# Altium PCB HW_ADHERENT_SYSCTRL_R1.PcbDoc (part 2 of 3)
Units mm, origin at the board's own origin, x right, y up, seen from the top; angles counter-clockwise.
Board outline 160 x 150 mm, 4 copper layers (Top Layer, Int1 (GND), Int2 (PWR), Bottom Layer), stack 1.369 mm thick; 228 components, 143 nets, 829 pads, 0 vias.
Unrouted connection lines stored in the file: 328.
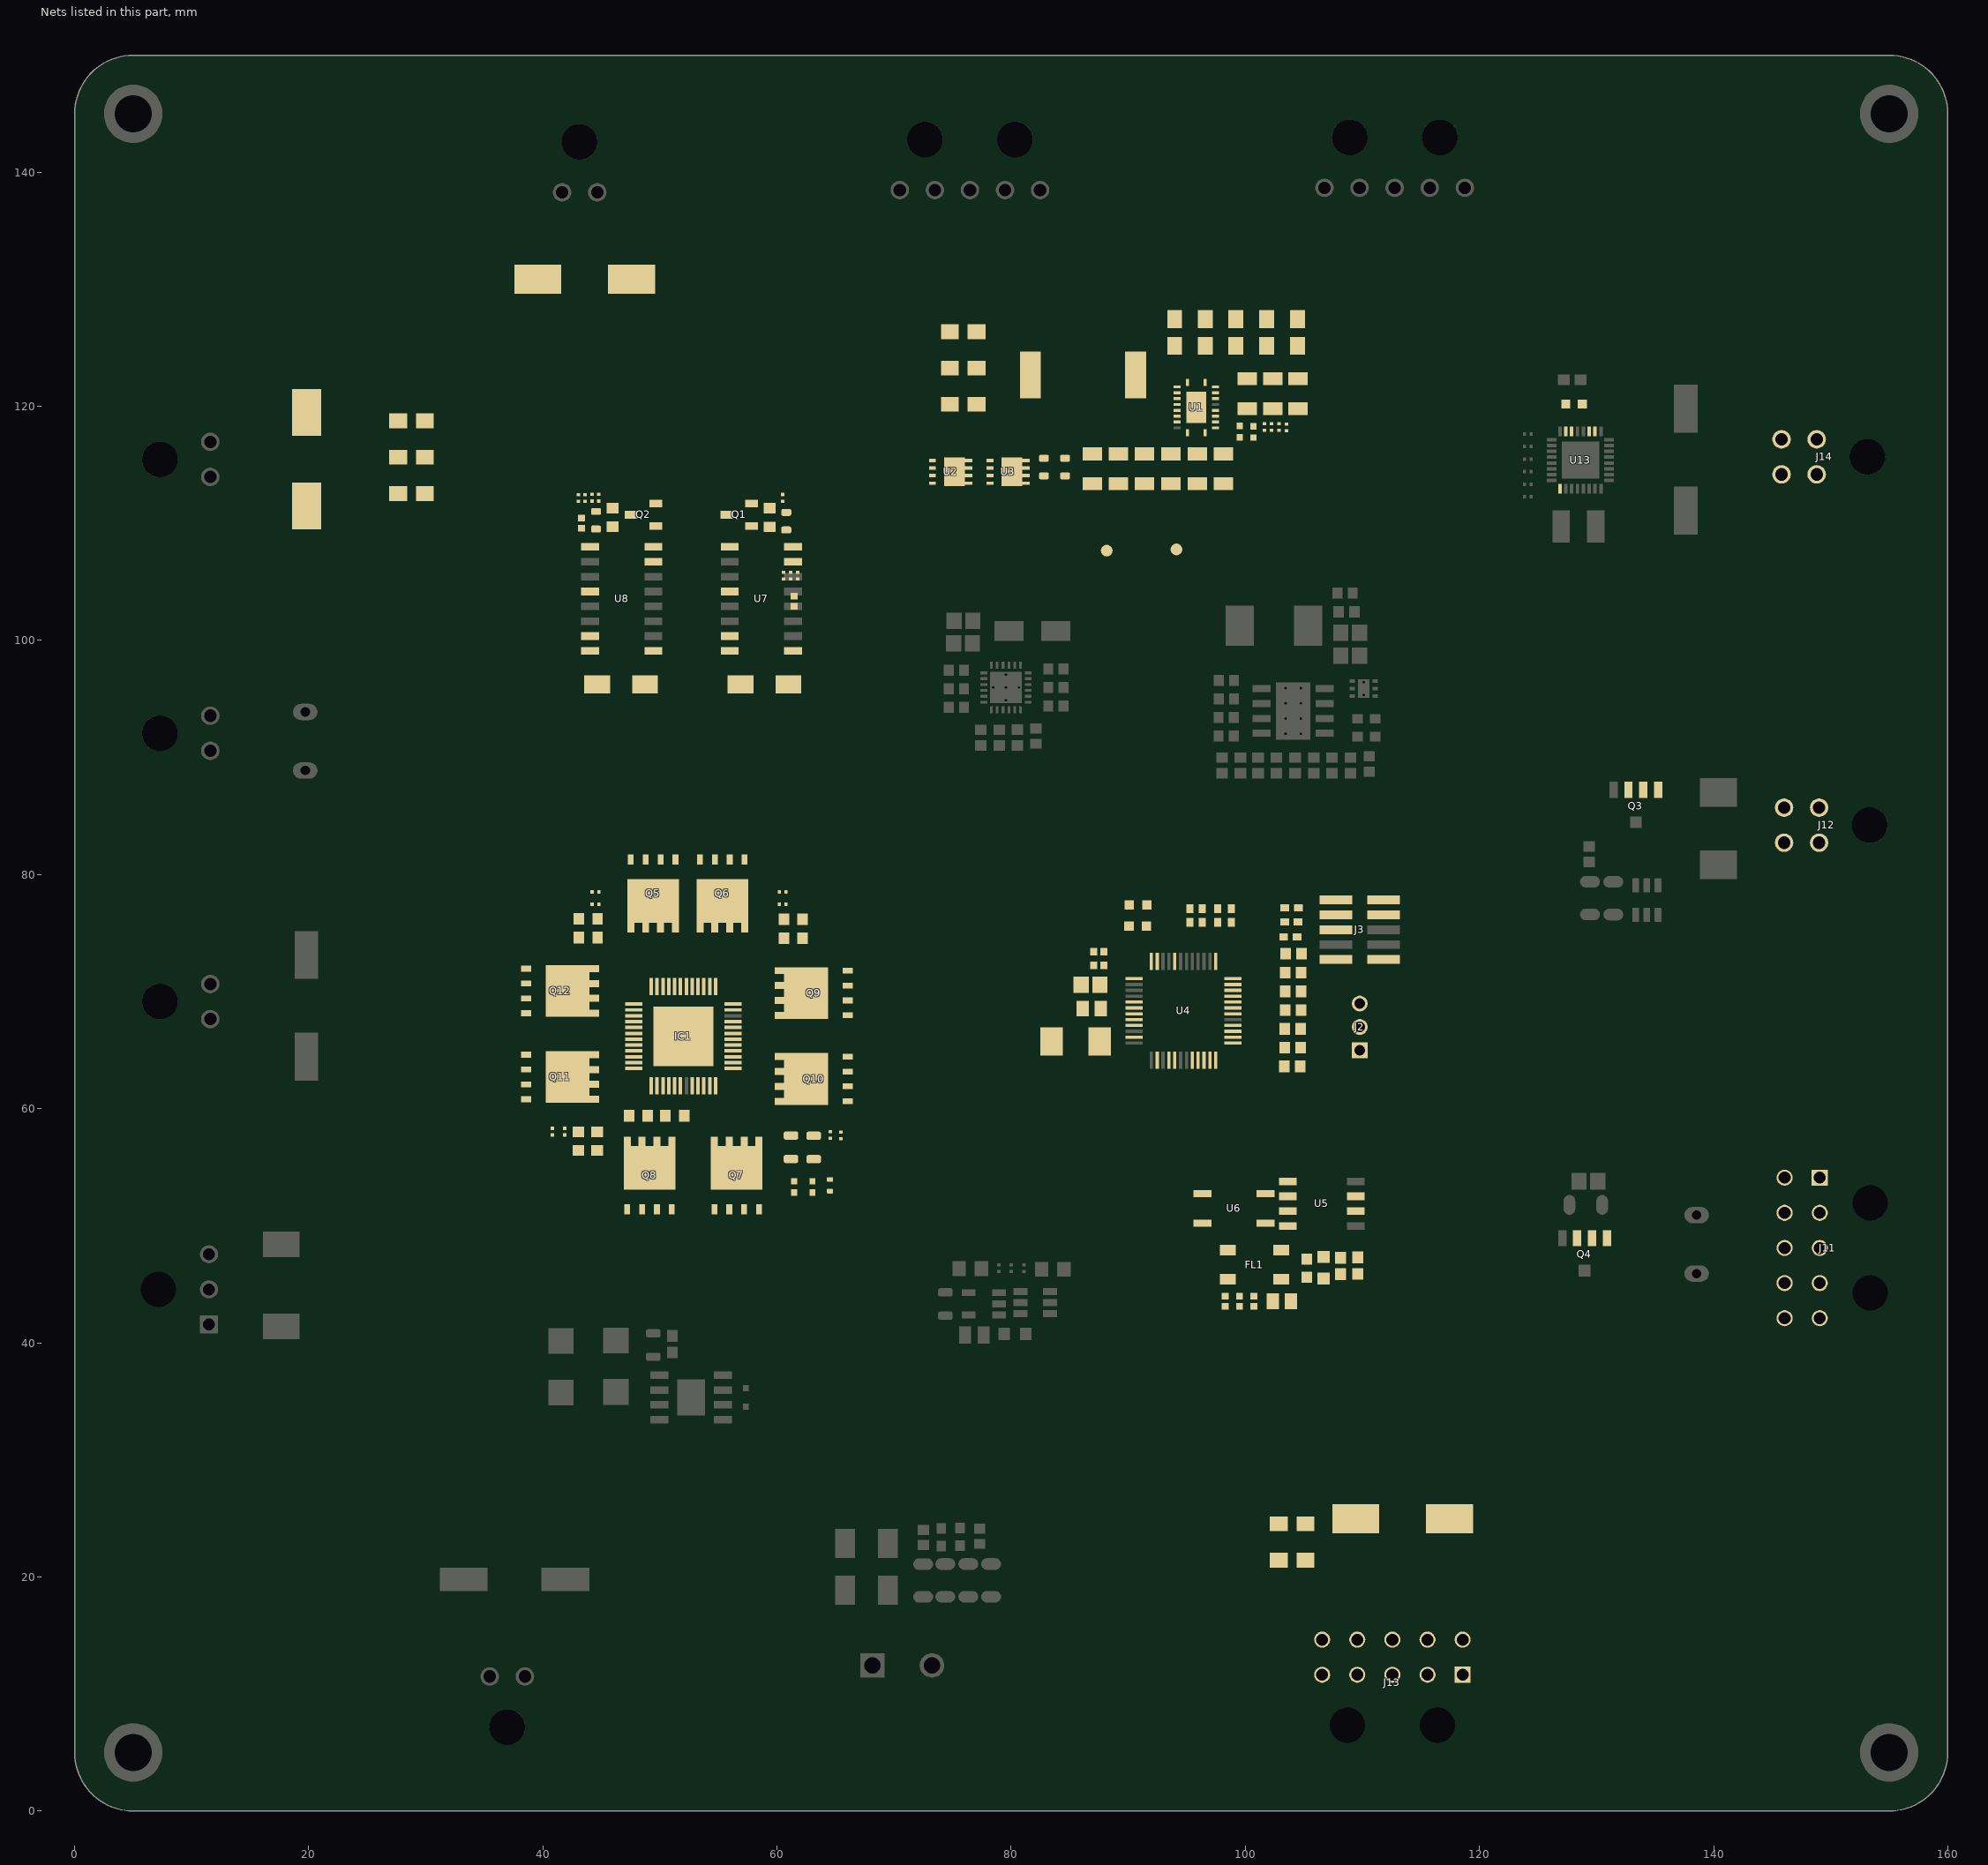
[diagram p4: the nets of this part, all layers, seen from the top]

## Part data
C1 C9 C10: library part 150uF-6.3V-20%-AL-LOESR-SMD_5x6_5, "CAP ALUM POLY 100UF 20% 50V SMD", manufacturer=Nichicon, Manufacturer Part Number=PCV1H101MCL2GS, Supplier Part Number=493-4558-1-ND
C2 C3 C4 C5: library part CAP1206_4.7uF_100V, "4.7 µF ±10% 100V Ceramic Capacitor X7S 1206 (3216 Metric)", Manufacturer Part Number=12061Z475KAT2A, Order Code="DIGI : 445-180362-1-ND"
C6 C8: library part Cap, "CAP CER 0.1UF 50V X7R 0402", manufacturer="TDK Corporation", Manufacturer Part Number=C1005X7R1H104K050BB, Supplier Part Number=445-5932-1-ND
C7 C32 C33 C34 C35 C37 C59 C61 C65 C66 C67 C68 C69: library part C0201-100n, "Capacitor, X5R, ±10%", manufacturer=N.A., Part number IPS="00000001248, 00000002505", Part number NEMS=100200078, Part number Norautron=262071862, Artikkelnr Noca=N.A., Author=rsk, Component Class=Capacitors, Component Status=Active, componentlink1description=Datasheet, componentlink1url=N.A., componentlink2description="Supplier link", componentlink2url=N.A., Footprint Doc=0201, HelpURL=N.A., LatestRevisionDate=2017-11-09, Manufacturer Part Number=N.A., Note=16V, Pad Count=2, Part Number=C0201-100n, partid=100200078, Published=2014-11-13, Supplier 1=N.A., Supplier 2=N.A., Supplier Part Number 1=N.A., Supplier Part Number 2=N.A.
C11: library part GRM21BZ71H475KE15K, "CAP CER 4.7UF 50V X7R 0805", Device Package="0805 (2012 Metric)", manufacturer="Murata Electronics", Operating Temperature="-55°C ~ 125°C", Supplier Part Number 1=490-GRM21BZ71H475KE15KCT-ND, Temperature Coefficient=X7R, Tolerance=±10%, Voltage - Rated=50V, Applications="General Purpose", Capacitance="4.7 µF", componentlink1description=Datasheet, componentlink1url=https://search.murata.co.jp/Ceramy/image/img/A01X/G101/ENG/GRM21BZ71H475KE15-01.pdf, componentlink2description="DigiKey Link", componentlink2url=https://www.digikey.com/en/products/detail/murata-electronics/GRM21BZ71H475KE15K/13904908, lastupdated="6.04.2026 19:31:51", Lifecycle Status=Active, Minimum Order=1, Mounting Type="Surface Mount, MLCC", Package / Case="0805 (2012 Metric)", packaging=TapeAndReel, Part Number=GRM21BZ71H475KE15K, Part Status=Active, partid=39591, price=0.17, series=GRM, Size / Dimension="0.079\" L x 0.049\" W (2.00mm x 1.25mm)", Supplier 1=DigiKey, Thickness (Max)="0.057\" (1.45mm)"
C12 C13 C14 C15 C16: "CAP CER 0.1UF 50V X7R 0603", Capacitance="0.1 µF", Device Package="0603 (1608 Metric)", manufacturer="Murata Electronics", Operating Temperature="-55°C ~ 125°C", Ratings=AEC-Q200, Supplier Part Number 1=490-8020-1-ND, Temperature Coefficient=X7R, Tolerance=±10%, Voltage - Rated=50V, Applications=Automotive, componentlink1description=Datasheet, componentlink1url=https://psearch.en.murata.com/capacitor/product/GCM188R71H104KA57%23.pdf, componentlink2description="DigiKey Link", componentlink2url=https://www.digikey.com/en/products/detail/murata-electronics/GCM188R71H104KA57J/2591942, lastupdated="6.04.2026 19:22:36", Lifecycle Status=Active, Minimum Order=1, Mounting Type="Surface Mount, MLCC", Package / Case="0603 (1608 Metric)", packaging=TapeAndReel, Part Number=GCM188R71H104KA57J, Part Status="Not For New Designs", partid=60442, price=0.03, series=GCM, Size / Dimension="0.063\" L x 0.031\" W (1.60mm x 0.80mm)", Supplier 1=DigiKey, Thickness (Max)="0.035\" (0.90mm)"
C17 C18: library part GMC04CG8R2J25NT, "CAP0402 COG 8.2PF 5% 25V", Device Package="0402 (1005 Metric)", manufacturer="Cal-Chip Electronics, Inc.", Operating Temperature="-55°C ~ 125°C", Supplier Part Number 1=4713-GMC04CG8R2J25NTCT-ND, Temperature Coefficient="C0G, NP0", Tolerance=±5%, Voltage - Rated=25V, Applications="General Purpose", Capacitance="8.2 pF", componentlink1description=Datasheet, componentlink1url=https://calchip.com/wp-content/uploads/2025/05/GMC-Series-3.pdf, componentlink2description="DigiKey Link", componentlink2url=https://www.digikey.com/en/products/detail/cal-chip-electronics-inc/GMC04CG8R2J25NT/27784357, Features="General Purpose", lastupdated="6.04.2026 19:06:51", Lifecycle Status=Active, Minimum Order=1, Mounting Type="Surface Mount, MLCC", Package / Case="0402 (1005 Metric)", packaging=TapeAndReel, Part Number=GMC04CG8R2J25NT, partid=61382, price=0.07, series=GMC, Size / Dimension="0.039\" L x 0.020\" W (1.00mm x 0.50mm)", Supplier 1=DigiKey, Thickness (Max)="0.022\" (0.55mm)"
C19: library part GMC10X7R105K25NT, "CAP0603 X7R 1UF 10% 25V", Device Package="0603 (1608 Metric)", manufacturer="Cal-Chip Electronics, Inc.", Operating Temperature="-55°C ~ 125°C", Supplier Part Number 1=4713-GMC10X7R105K25NTCT-ND, Temperature Coefficient=X7R, Tolerance=±10%, Voltage - Rated=25V, Applications="General Purpose", Capacitance="1 µF", componentlink1description=Datasheet, componentlink1url=https://calchip.com/wp-content/uploads/2023/05/gmc_series.pdf, componentlink2description="DigiKey Link", componentlink2url=https://www.digikey.com/en/products/detail/cal-chip-electronics-inc/GMC10X7R105K25NT/22461338, lastupdated="6.04.2026 19:18:33", Lifecycle Status=Active, Minimum Order=1, Mounting Type="Surface Mount, MLCC", Package / Case="0603 (1608 Metric)", packaging=TapeAndReel, Part Number=GMC10X7R105K25NT, partid=68086, price=0.01, series=GMC, Size / Dimension="0.063\" L x 0.031\" W (1.60mm x 0.80mm)", Supplier 1=DigiKey, Thickness (Max)="0.037\" (0.95mm)"
C20: library part C0603C103K4RECTU, "CAP CER 0603 10NF 16V X7R 10%", Device Package="0603 (1608 Metric)", manufacturer=KEMET, Operating Temperature="-55°C ~ 125°C", Supplier Part Number 1=399-C0603C103K4RECTUCT-ND, Temperature Coefficient=X7R, Tolerance=±10%, Voltage - Rated=16V, Applications="ESD Protection", Capacitance="10000 pF", componentlink1description=Datasheet, componentlink1url=https://search.kemet.com/download/datasheet/C0603C103K4REC7867, componentlink2description="DigiKey Link", componentlink2url=https://www.digikey.com/en/products/detail/kemet/C0603C103K4RECTU/8643658, lastupdated="6.04.2026 19:17:55", Lifecycle Status=Active, Minimum Order=1, Mounting Type="Surface Mount, MLCC", Package / Case="0603 (1608 Metric)", packaging=TapeAndReel, Part Number=C0603C103K4RECTU, partid=66152, price=0.01, series="ESD SMD Comm X7R", Size / Dimension="0.063\" L x 0.031\" W (1.60mm x 0.80mm)", Supplier 1=DigiKey, Thickness (Max)="0.034\" (0.87mm)"
C21 C24 C77: library part GMC10CG470F200NT, "47 pF ±1% 200V Ceramic Capacitor C0G, NP0 0603 (1608 Metric)", manufacturer="Cal-Chip Electronics, Inc.", MPN=GMC10CG470F200NT, Supplier=4713-GMC10CG470F200NTDKR-ND
C22: library part CAP1461, "CAP CER 10UF 25V X5R 0603", manufacturer="Murata Electronics North America", Manufacturer Part Number=GRM188R61E106MA73D, Supplier Part Number=490-7202-1-ND, Voltage=25V, Revision=1
C23: library part CAP0603_100nF, "CAP CER 0.1UF 50V X7R 0603", Order Code="DIGI : 399-5089-1-ND", P/N=C0603C104K5RACTU
C25 C26 C27 C28 C29: library part CAP1206_22uF_35V, "22 µF ±20% 35V Ceramic Capacitor X5R 1206 (3216 Metric)", Manufacturer Part Number=C3216X5R1V226M160AC, Order Code="DIGI : 445-180362-1-ND"
C30: library part CAP0603_8.2PF_50V, "8.2 pF ±0.25pF 50V Ceramic Capacitor C0G, NP0 0603 (1608 Metric)", LCSC Manufacturer Part Number=CC0603CRNPO9BN8R2, LCSC Part Number=C277519, Manufacturer Part Number=CC0603CRNPO9BN8R2, Order Code="DIGI : 311-3865-2-ND"
C31: library part CAP0603_2.2UF_16V, "2.2 µF ±10% 16V Ceramic Capacitor X7S 0603 (1608 Metric)", Manufacturer Part Number=GRT188C71C225KE13D, Order Code="DIGI: 490-GRT188C71C225KE13DTR-ND"
C36 C38: library part C0201-10n, "Capacitor, X7R, ±10%", manufacturer=N.A., Part number IPS=00000003480, Part number NEMS=100200067, Part number Norautron=26621779, Artikkelnr Noca=N.A., Author=rsk, Component Class=Capacitors, Component Status=Active, componentlink1description=Datasheet, componentlink1url=N.A., componentlink2description="Supplier link", componentlink2url=N.A., Footprint Doc=0201, HelpURL=N.A., LatestRevisionDate=2017-11-09, Manufacturer Part Number=N.A., Note=10V, Pad Count=2, Part Number=C0201-10n, partid=100200067, Published=2014-11-13, Supplier 1=N.A., Supplier 2=N.A., Supplier Part Number 1=N.A., Supplier Part Number 2=N.A.
C39 C40: library part ECA-1HM471, "CAP ALUM 470UF 20% 50V RADIAL", Device Package="Radial, Can", Lifetime @ Temp.="2000 Hrs @ 85°C", manufacturer="Panasonic Electronic Components", Operating Temperature="-40°C ~ 85°C", Ripple Current @ High Frequency="1.105A @ 10kHz", Ripple Current @ Low Frequency="650mA @ 120Hz", Supplier Part Number 1=P5185-ND, Tolerance=±20%, Voltage - Rated=50V, Applications="General Purpose", Capacitance=470µF, componentlink1description=Datasheet, componentlink1url=//media.digikey.com/pdf/Data%20Sheets/Panasonic%20Electronic%20Components/ECA-xxM%20Series,TypeA.pdf, componentlink2description="DigiKey Link", componentlink2url=http://digikey.com/product-detail/en/panasonic-electronic-components/ECA-1HM471/P5185-ND/245044, Height - Seated (Max)="0.866\" (22.00mm)", lastupdated="2.09.2020 01:31:40", Lead Spacing="0.197\" (5.00mm)", Lifecycle Status=Active, Minimum Order=1, Mounting Type="Through Hole", Package / Case="Radial, Can", packaging=Bulk, Part Number=ECA-1HM471, Part Status=Active, partid=13256, Polarization=Polar, price=0.64, series=M, Size / Dimension="0.394\" Dia (10.00mm)", Supplier 1=DigiKey
C41 C43 C44 C53 C56: library part 08051C105K4T2A, "CAP CER 1UF 100V X7R 0805", Device Package="0805 (2012 Metric)", manufacturer="AVX Corporation", Operating Temperature="-55°C ~ 125°C", Ratings=AEC-Q200, Supplier Part Number 1=478-12142-1-ND, Temperature Coefficient=X7R, Tolerance=±10%, Voltage - Rated=100V, Applications=Automotive, Capacitance=1µF, componentlink1description=Datasheet, componentlink1url=http://datasheets.avx.com/AutoMLCC.pdf, componentlink2description="DigiKey Link", componentlink2url=http://digikey.com/product-detail/en/avx-corporation/08051C105K4T2A/478-12142-1-ND/9374711, lastupdated="2.09.2020 01:04:22", Lifecycle Status=Active, Minimum Order=1, Mounting Type="Surface Mount, MLCC", Package / Case="0805 (2012 Metric)", packaging=TapeAndReel, Part Number=08051C105K4T2A, Part Status=Active, partid=13414, price=0.09, series=-, Size / Dimension="0.079\" L x 0.049\" W (2.01mm x 1.25mm)", Supplier 1=DigiKey
C42: library part CL10A474KA8NNNC, "CAP CER 0.47UF 25V X5R 0603", Device Package="0603 (1608 Metric)", manufacturer="Samsung Electro-Mechanics", Operating Temperature="-55°C ~ 85°C", Supplier Part Number 1=1276-1895-1-ND, Temperature Coefficient=X5R, Tolerance=±10%, Voltage - Rated=25V, Applications="General Purpose", Capacitance="0.47 µF", componentlink1description=Datasheet, componentlink1url=http://www.samsungsem.com/kr/support/product-search/mlcc/CL10A474KA8NNNC.jsp, componentlink2description="DigiKey Link", componentlink2url=https://www.digikey.com/en/products/detail/samsung-electro-mechanics/CL10A474KA8NNNC/3887553, lastupdated="6.04.2026 19:23:45", Lifecycle Status=Active, Minimum Order=1, Mounting Type="Surface Mount, MLCC", Package / Case="0603 (1608 Metric)", packaging=TapeAndReel, Part Number=CL10A474KA8NNNC, Part Status=Active, partid=4224, price=0.01, series=CL, Size / Dimension="0.063\" L x 0.031\" W (1.60mm x 0.80mm)", Supplier 1=DigiKey, Thickness (Max)="0.035\" (0.90mm)"
C45 C50 C51: library part HMK107BJ104KA-T, "CAP CER 0.1UF 100V X5R 0603", Device Package="0603 (1608 Metric)", manufacturer="Taiyo Yuden", Operating Temperature="-55°C ~ 85°C", Supplier Part Number 1=587-5862-1-ND, Temperature Coefficient=X5R, Tolerance=±10%, Voltage - Rated=100V, Applications="SMPS Filtering", Capacitance="0.1 µF", componentlink1description=Datasheet, componentlink1url="https://ds.yuden.co.jp/TYCOMPAS/ut/detail?pn=HMK107BJ104KA-T  &u=M", componentlink2description="DigiKey Link", componentlink2url=https://www.digikey.com/en/products/detail/taiyo-yuden/HMK107BJ104KA-T/4970694, Features="High Voltage", lastupdated="6.04.2026 19:23:31", Lifecycle Status=Active, Minimum Order=1, Mounting Type="Surface Mount, MLCC", Package / Case="0603 (1608 Metric)", packaging=TapeAndReel, Part Number=HMK107BJ104KA-T, Part Status=Active, partid=8162, price=0.01, series=M, Size / Dimension="0.063\" L x 0.031\" W (1.60mm x 0.80mm)", Supplier 1=DigiKey, Thickness (Max)="0.035\" (0.90mm)"
C46: library part CL10B223KO8WPNC, "CAP CER 22NF 16V X7R 0603", Device Package="0603 (1608 Metric)", manufacturer="Samsung Electro-Mechanics", Operating Temperature="-55°C ~ 125°C", Ratings=AEC-Q200, Supplier Part Number 1=1276-CL10B223KO8WPNCCT-ND, Temperature Coefficient=X7R, Tolerance=±10%, Voltage - Rated=16V, Applications=Automotive, Capacitance="0.022 µF", componentlink1description=Datasheet, componentlink1url=https://mm.digikey.com/Volume0/opasdata/d220001/medias/docus/5458/CL10B223KO8WPNC_Spec.pdf, componentlink2description="DigiKey Link", componentlink2url=https://www.digikey.com/en/products/detail/samsung-electro-mechanics/CL10B223KO8WPNC/20498563, Features="Open Mode", lastupdated="6.04.2026 19:17:38", Lifecycle Status=Active, Minimum Order=1, Mounting Type="Surface Mount, MLCC, Epoxy", Package / Case="0603 (1608 Metric)", packaging=TapeAndReel, Part Number=CL10B223KO8WPNC, partid=64880, price=0.01, series=CL, Size / Dimension="0.063\" L x 0.031\" W (1.60mm x 0.80mm)", Supplier 1=DigiKey, Thickness (Max)="0.035\" (0.88mm)"
C47: library part C0603C103M4REC7411, "CAP CER 0603 10NF 16V X7R 20%", Device Package="0603 (1608 Metric)", manufacturer=KEMET, Operating Temperature="-55°C ~ 125°C", Supplier Part Number 1=399-C0603C103M4REC7411CT-ND, Temperature Coefficient=X7R, Tolerance=±20%, Voltage - Rated=16V, Applications="ESD Protection", Capacitance="10000 pF", componentlink1description=Datasheet, componentlink1url=https://connect.kemet.com:7667/gateway/IntelliData-ComponentDocumentation/1.0/download/datasheet/C0603C103M4REC7411, componentlink2description="DigiKey Link", componentlink2url=https://www.digikey.com/en/products/detail/kemet/C0603C103M4REC7411/8645113, lastupdated="6.04.2026 19:20:47", Lifecycle Status=Active, Minimum Order=1, Mounting Type="Surface Mount, MLCC", Package / Case="0603 (1608 Metric)", packaging=TapeAndReel, Part Number=C0603C103M4REC7411, Part Status=Active, partid=52195, price=0.01, series="ESD SMD Comm X7R", Size / Dimension="0.063\" L x 0.031\" W (1.60mm x 0.80mm)", Supplier 1=DigiKey, Thickness (Max)="0.034\" (0.87mm)"
C48 C49: library part CL10A475KL8NRNC, "CAP CER 4.7UF 35V X5R 0603", Device Package="0603 (1608 Metric)", manufacturer="Samsung Electro-Mechanics", Operating Temperature="-55°C ~ 85°C", Supplier Part Number 1=1276-6794-1-ND, Temperature Coefficient=X5R, Tolerance=±10%, Voltage - Rated=35V, Applications="General Purpose", Capacitance="4.7 µF", componentlink1description=Datasheet, componentlink1url=http://www.samsungsem.com/kr/support/product-search/mlcc/CL10A475KL8NRNC.jsp, componentlink2description="DigiKey Link", componentlink2url=https://www.digikey.com/en/products/detail/samsung-electro-mechanics/CL10A475KL8NRNC/5961278, lastupdated="6.04.2026 19:23:51", Lifecycle Status=Active, Minimum Order=1, Mounting Type="Surface Mount, MLCC", Package / Case="0603 (1608 Metric)", packaging=TapeAndReel, Part Number=CL10A475KL8NRNC, Part Status=Active, partid=2652, price=0.08, series=CL, Size / Dimension="0.063\" L x 0.031\" W (1.60mm x 0.80mm)", Supplier 1=DigiKey, Thickness (Max)="0.035\" (0.90mm)"
C52 C55 C57 C58: library part CL10A226MP8NRNC, "CAP CER 22UF 10V X5R 0603", Device Package="0603 (1608 Metric)", manufacturer="Samsung Electro-Mechanics", Operating Temperature="-55°C ~ 85°C", Supplier Part Number 1=1276-CL10A226MP8NRNCCT-ND, Temperature Coefficient=X5R, Tolerance=±20%, Voltage - Rated=10V, Applications="General Purpose", Capacitance="22 µF", componentlink1description=Datasheet, componentlink1url=https://mm.digikey.com/Volume0/opasdata/d220001/medias/docus/339/CL10A226MP8NRNC_Spec.pdf, componentlink2description="DigiKey Link", componentlink2url=https://www.digikey.com/en/products/detail/samsung-electro-mechanics/CL10A226MP8NRNC/10478990, lastupdated="6.04.2026 19:18:15", Lifecycle Status=Active, Minimum Order=1, Mounting Type="Surface Mount, MLCC", Package / Case="0603 (1608 Metric)", packaging=TapeAndReel, Part Number=CL10A226MP8NRNC, partid=67717, price=0.06, series=CL, Size / Dimension="0.063\" L x 0.031\" W (1.60mm x 0.80mm)", Supplier 1=DigiKey, Thickness (Max)="0.039\" (1.00mm)"
C54: library part 0603YW106MAT2A, "CAP CER 10UF 16V X6S 0603", Device Package="0603 (1608 Metric)", manufacturer="KYOCERA AVX", Operating Temperature="-55°C ~ 105°C", Supplier Part Number 1=478-KGM15CS61C106MTCT-ND, Temperature Coefficient=X6S, Tolerance=±20%, Voltage - Rated=16V, Applications="General Purpose", Capacitance="10 µF", componentlink2description="DigiKey Link", componentlink2url=https://www.digikey.com/en/products/detail/kyocera-avx/0603YW106MAT2A/16602928, lastupdated="6.04.2026 19:22:07", Lifecycle Status=Active, Minimum Order=1, Mounting Type="Surface Mount, MLCC", Package / Case="0603 (1608 Metric)", packaging=CutTape, Part Number=0603YW106MAT2A, Part Status=Active, partid=46681, price=0.08, series="KGM - X6S", Size / Dimension="0.063\" L x 0.031\" W (1.60mm x 0.80mm)", Supplier 1=DigiKey, Thickness (Max)="0.039\" (1.00mm)"
C60 C76: library part C0201-22n-10V-X5R-GRM033R61A223KE84_1, "Capacitor, Ceramic, 22nF 10V X5R 0201,±10%", manufacturer=Murata, Manufacturer Part Number=GRM033R61A223KE84D, Part Number=C0201-22n-10V-X5R-GRM033R61A223KE84, Part number IPS=N.A., Part number NEMS=100200495, Supplier Part Number 1=81-GRM033R61A223KE4E, Artikkelnr Noca=N.A., Author=prbu, Component Class=Capacitors, Component Status=Active, componentlink1description=Datasheet, componentlink1url=https://www.murata.com/en-sg/products/productdetail?partno=GRM033R61A223KE84%23, componentlink2description="Supplier link", componentlink2url=https://www.mouser.com/ProductDetail/Murata-Electronics/GRM033R61A223KE84E?qs=BZBei1rCqCCPqziwOnRusw%3D%3D, Footprint Doc=0201, HelpURL=N.A., LatestRevisionDate=2021-12-09, Note=10V, Pad Count=2, Part number Norautron=N.A., partid=100200495, Published=2021-12-09, Supplier 1=Mouser, Supplier 2=Digi-Key, Supplier Part Number 2=490-13334-1-ND
C62 C63 C80 C82: library part CAP0805_4.7UF_50V, "4.7 µF ±10% 50V Ceramic Capacitor X5R 0805 (2012 Metric)", Manufacturer Part Number=GRT21BR61H475KE13L, Order Code="DIGI: 490-12394-2-ND"
C64: library part CAP0402_470NF_10V, "0.47 µF ±10% 10V Ceramic Capacitor X5R 0402 (1005 Metric)", LCSC Manufacturer Part Number=CL05A474KP5NNNC, LCSC Part Number=C47339, Manufacturer Part Number=CL05A474KP5NNNC, Order Code="DIGI: 1276-1173-2-ND"
C70: library part EEE-FK1K470P, "47 µF 80 V Aluminum Electrolytic Capacitors Radial, Can - SMD 2000 Hrs @ 105°C", manufacturer="Panasonic Industry", Supplier="Digi; PCE3831DKR-ND"
C71 C74: library part EEE-FK1J101P, "100 µF 63 V Aluminum Electrolytic Capacitors Radial, Can - SMD 2000 Hrs @ 105°C", manufacturer="Panasonic Industry", Supplier="Digi; PCE3819DKR-ND"
C72 C78: library part C0201-100n-25V-X5R, "Capacitor, Ceramic, X5R, ±10%, 25V", manufacturer=Murata, Manufacturer Part Number=GRM033R61E104KE14J, Part number IPS=N.A., Part number NEMS=100200459, Supplier Part Number 1=490-14571-1-ND, Artikkelnr Noca=N.A., Author=rsk, Component Class=Capacitors, Component Status=Active, componentlink1description=Datasheet, componentlink1url=https://search.murata.co.jp/Ceramy/image/img/A01X/G101/ENG/GRM033R61E104KE14-01.pdf, componentlink2description="Supplier link", componentlink2url=https://www.murata.com/en-global/products/productdetail?partno=GRM033R61E104KE14%23, Footprint Doc=0201, HelpURL=N.A., LatestRevisionDate=2020-12-16, Note=25V, Pad Count=2, Part Number=C0201-100n-25V-X5R, Part number Norautron=N.A., partid=100200459, Published=2020-12-16, Supplier 1=Digi-Key, Supplier 2=Mouser, Supplier Part Number 2=81-GRM033R61E104KE4J
C73: library part CAP1210_47UF_16V, "16V 47uF X5R ±10% 1210 Multilayer Ceramic Capacitors MLCC - SMD/SMT ROHS", LCSC Manufacturer Part Number=CS3225X5R476K160NRL, LCSC Part Number=C2918513, Manufacturer Part Number=CS3225X5R476K160NRL, Order Code="LCSC: C2918513"
C75: library part 0603X225K250CT, "2.2 µF ±10% 25V Ceramic Capacitor X5R 0603 (1608 Metric)", JLCPCB PART#=C237194, manufacturer="Walsin Technology Corporation", Supplier="Digi; 1292-0603X225K250CTDKR-ND"
C79: library part CAP0805_4.7nF_1kV, "4700 pF ±10% 1000V (1kV) Ceramic Capacitor X7R 0805 (2012 Metric)", Manufacturer Part Number=C0805C472KDRAC7800, Manufacturer_Name="Samsung Electro-Mechanics", Datasheet Link=https://www.yageo.com/upload/media/product/productsearch/datasheet/mlcc/UPY-GPHC_X5R_4V-to-50V_27.pdf, Height=1.45mm, Mouser Price/Stock=https://www.mouser.co.uk/ProductDetail/YAGEO/CC0805KKX5R8BB106?qs=57cj7OiSijm89pM64t1AGQ%3D%3D
C81 C83: library part Cap_1_3, "CAP CER 47UF 10V X5R 0805", manufacturer="Murata Electronics North America", Manufacturer Part Number=GRM21BR61A476ME15K, Supplier Part Number=490-GRM21BR61A476ME15KCT-ND
D1 D2: "Diode", Manufacturer_Name="HY Electronic", Height=2.62mm, Manufacturer_Part_Number=SS36A
D3 D4: library part LTST-C191KRKT_2, "Red 631nm LED Indication - Discrete 2V 0603 (1608 Metric)", Color="Red Clear", manufacturer="Lite-On Inc.", Manufacturer Part Number=LTST-C191KRKT, Order Code="DIGI: 160-1447-2-ND"
D5: "TVS DIODE 33VWM 53.3VC DO214AB", Current - Peak Pulse (10/1000µs)=56.3A, manufacturer="Littelfuse Inc.", Operating Temperature="-65°C ~ 150°C (TJ)", Package / Case="DO-214AB, SMC", Power - Peak Pulse="3000W (3kW)", Power Line Protection=No, Supplier Device Package="DO-214AB (SMCJ)", Supplier Part Number 1=SMDJ33ACT-ND, Voltage - Breakdown (Min)=36.7V, Voltage - Clamping (Max) @ Ipp=53.3V, Voltage - Reverse Standoff (Typ)=33V, Applications="General Purpose", componentlink1description=Datasheet, componentlink1url=https://www.littelfuse.com/~/media/electronics/datasheets/tvs_diodes/littelfuse_tvs_diode_smdj_datasheet.pdf.pdf, componentlink2description="DigiKey Link", componentlink2url=https://www.digikey.com/en/products/detail/littelfuse-inc/SMDJ33A/1835325, lastupdated="5.04.2026 20:34:02", Lifecycle Status=Active, Minimum Order=1, Mounting Type="Surface Mount", packaging=TapeAndReel, Part Number=SMDJ33A, Part Status=Active, partid=7128, price=0.33, series=SMDJ, Supplier 1=DigiKey, Type=Zener, Unidirectional Channels=1
D6 D8 D10: "TVS DIODE 33VWM 53.3VC DO214AC", Current - Peak Pulse (10/1000µs)=7.5A, manufacturer="Littelfuse Inc.", Operating Temperature="-65°C ~ 150°C (TJ)", Package / Case="DO-214AC, SMA", Power - Peak Pulse=400W, Power Line Protection=No, Supplier Device Package="DO-214AC (SMA)", Supplier Part Number 1=SMAJ33ALFCT-ND, Voltage - Breakdown (Min)=36.7V, Voltage - Clamping (Max) @ Ipp=53.3V, Voltage - Reverse Standoff (Typ)=33V, Applications="General Purpose", componentlink1description=Datasheet, componentlink1url=https://www.littelfuse.com/~/media/electronics/datasheets/tvs_diodes/littelfuse_tvs_diode_smaj_datasheet.pdf.pdf, componentlink2description="DigiKey Link", componentlink2url=https://www.digikey.com/en/products/detail/littelfuse-inc/SMAJ33A/762296, lastupdated="5.04.2026 20:34:16", Lifecycle Status=Active, Minimum Order=1, Mounting Type="Surface Mount", packaging=TapeAndReel, Part Number=SMAJ33A, Part Status=Active, partid=5718, price=0.06, series=SMAJ, Supplier 1=DigiKey, Type=Zener, Unidirectional Channels=1
D7 D9 D11 D12: library part LED, "LED, Bright Green, 0603", manufacturer="Lite-On Inc.", Supplier Part Number=160-1446-1-ND, Manufacturer Part Number=LTST-C191KGKT
D13 D14: "TVS Diode (Uni-directional)", Manufacturer_Name=STMicroelectronics, Datasheet Link=https://www.st.com/resource/en/datasheet/smbj12a.pdf, Height=2.45mm
  D13: Manufacturer_Part_Number=SMBJ33A
  D14: Manufacturer_Part_Number=SMBJ24A
D15: "Schottky Diode", Manufacturer_Name=Lite-On, Arrow Part Number=B560C, Arrow Price/Stock=https://www.arrow.com/en/products/b560c/lite-on-technology.html?utm_currency=USD&region=nac, Datasheet Link=https://datasheet.datasheetarchive.com/originals/distributors/Datasheets-17/DSA-323419.pdf, Height=2.5mm, Manufacturer_Part_Number=B560C
D16: "Diode", Manufacturer_Name=Diotec, Mouser Part Number=637-ESD5Z5V0, Arrow Part Number=ESD5Z5V0, Arrow Price/Stock=https://www.arrow.com/en/products/esd5z5v0/diotec-semiconductor-ag?utm_currency=USD&region=nac, Datasheet Link=https://www.mouser.in/datasheet/2/849/esd5z2v5-2891948.pdf, Height=0.7mm, Manufacturer_Part_Number=ESD5Z5V0, Mouser Price/Stock=https://www.mouser.co.uk/ProductDetail/Diotec-Semiconductor/ESD5Z5V0?qs=OlC7AqGiEDkOteFEVl3upQ%3D%3D
F1 F2 F3 F4 F5 F6 F7: library part Fuse, "Fuse,Resettable 4A 75V,SMD 1206,TLC", manufacturer=TLC, Manufacturer P/N=F12F4, Reserve Value=4A, Datasheet="F12F Series.pdf", Myir P/N=20801.00014, Part Type="Resettable Fuse", PCB Footprint=F1206
FB1 FB2: library part FB0402-120R@100M-500mA, "Ferrite Bead, 120 Ohm @ 100MHz, 500mA, 250 mOhm Max", manufacturer=Murata, Manufacturer Part Number=BLM15AG121SN1D, Part number IPS=00000009954, Part number NEMS=100300099, Part number Norautron=265230631, Supplier Part Number 1=490-1005-1-ND, Artikkelnr Noca=33029317, Author=rsk, Component Class=Inductors, Component Status=Active, componentlink1description=Datasheet, componentlink1url=N.A., componentlink2description="Supplier link", componentlink2url=N.A., Footprint Doc=0402, HelpURL=http://search.murata.co.jp/Ceramy/image/img/PDF/ENG/L0110S0100BLM15A_SN.pdf, LatestRevisionDate=2014-01-10, Note="Chip EMIFIL Inductor Type Chip Ferrite Bead", Pad Count=2, Part Number=FB0402-120R@100M-500mA, partid=100300099, Published=2011-11-14, Supplier 1=Digi-Key, Supplier 2=Farnell, Supplier Part Number 2=151-5760
FL1: "51 ÂµH @ 100 kHz 2 Line Common Mode Choke Surface Mount 2.8 kOhms @ 10 MHz 200mA DCR 1Ohm", Package="Horizontal-4 TDK", Check_prices=https://www.snapeda.com/parts/ACT45B-510-2P-TL003/TDK/view-part/?ref=eda, MF=TDK, MP=ACT45B-510-2P-TL003, SnapEDA_Link=https://www.snapeda.com/parts/ACT45B-510-2P-TL003/TDK/view-part/?ref=snap
IC1: "Integrated Circuit", Manufacturer_Name="Analog Devices", Mouser Part Number=N/A, Datasheet Link=https://datasheet.datasheetarchive.com/originals/distributors/DKDS-40/47761.pdf, Height=1.2mm, Manufacturer_Part_Number=TMC5160-TA, Mouser Price/Stock=https://www.mouser.co.uk/ProductDetail/ADI-Trinamic/TMC5160-TA?qs=TiOZkKH1s2S%2FryBy%252BZXLdA%3D%3D
IC2: "Integrated Circuit", Manufacturer_Name="Texas Instruments", Mouser Part Number=595-TPS54560BDDAR, Arrow Part Number=TPS54560BDDAR, Arrow Price/Stock=https://www.arrow.com/en/products/tps54560bddar/texas-instruments.html?utm_currency=USD&region=nac, Datasheet Link=http://www.ti.com/lit/gpn/TPS54560B, Height=1.7mm, Manufacturer_Part_Number=TPS54560BDDAR, Mouser Price/Stock=https://www.mouser.co.uk/ProductDetail/Texas-Instruments/TPS54560BDDAR?qs=gZXFycFWdAMPyxqrm5VZeg%3D%3D
IC3: "Integrated Circuit", Manufacturer_Name="Diodes Incorporated", Mouser Part Number=621-74AHCT1G125W5-7, Arrow Part Number=74AHCT1G125W5-7, Arrow Price/Stock=https://www.arrow.com/en/products/74ahct1g125w5-7/diodes-incorporated.html?utm_currency=USD&region=nac, Datasheet Link=https://www.diodes.com//assets/Datasheets/74AHCT1G125.pdf, Height=1.4mm, Manufacturer_Part_Number=74AHCT1G125W5-7, Mouser Price/Stock=https://www.mouser.co.uk/ProductDetail/Diodes-Incorporated/74AHCT1G125W5-7?qs=MKoP7Oyr0W7vMAMo33ehAw%3D%3D
J1: "Pluggable Header 5.08mm 12AWG 320V 12A 2 Position COMBICON MSTBA Series", Package=None, Check_prices=https://www.snapeda.com/parts/1757242/Phoenix+Contact/view-part/?ref=eda, MF="Phoenix Contact", MP=1757242, SnapEDA_Link=https://www.snapeda.com/parts/1757242/Phoenix+Contact/view-part/?ref=snap
J2: "Connector", Manufacturer_Name=Sullins, Datasheet Link=https://drawings-pdf.s3.amazonaws.com/11623.pdf, Height=6.3mm, Manufacturer_Part_Number=SWR201-NRTN-S03-SA-WH
J3: library part FTSH-105-01-F-DV-K, "Connector Header Surface Mount 10 position 0.050\" (1.27mm)", Manufacturer Part Number=FTSH-105-01-F-DV-K, Order Code="DIGI: SAM8796-ND"
J4 J5 J6 J7 J10: "Connector Header Through Hole, Right Angle 2 position 0.118 (3.00mm)", Package=None, Check_prices=https://www.snapeda.com/parts/436500200/Molex/view-part/?ref=eda, MF=Molex, MP=436500200, SnapEDA_Link=https://www.snapeda.com/parts/436500200/Molex/view-part/?ref=snap
J8 J9: "Connector Header Through Hole, Right Angle 5 position 0.118 (3.00mm)", Package=None, Check_prices=https://www.snapeda.com/parts/436500500/Molex/view-part/?ref=eda, MF=Molex, MP=436500500, SnapEDA_Link=https://www.snapeda.com/parts/436500500/Molex/view-part/?ref=snap
J11 J13: "Connector", Manufacturer_Name=Molex, Datasheet Link=https://www.molex.com/pdm_docs/sd/430450200_sd.pdf, Height=8.77mm, Manufacturer_Part_Number=430451000
J12 J14: "Connector Header Through Hole, Right Angle 4 position 0.118\" (3.00mm)", Manifacturer=MOLEX, Supplier="Digi; WM1814-ND"
J15: "Connector", Manufacturer_Name=Molex, Mouser Part Number=538-43650-0300, Arrow Part Number=43650-0300, Arrow Price/Stock=https://www.arrow.com/en/products/43650-0300/molex?region=nac, Datasheet Link=https://www.molex.com/pdm_docs/sd/436500200_sd.pdf, Height=13.56mm, Manufacturer_Part_Number=43650-0300, Mouser Price/Stock=https://www.mouser.co.uk/ProductDetail/Molex/43650-0300?qs=P7cO%252B%252BFDLzTpuYfoYulxAA%3D%3D
L1: library part IND_6.2uH_4A, "6.2 µH Shielded Drum Core, Wirewound Inductor 4 A 16.5mOhm Nonstandard", Arrow Part Number=SRU1038-6R2Y, Manufacturer_Name=Bourns, Mouser Part Number=652-SRU1038-6R2Y, Arrow Price/Stock=https://www.arrow.com/en/products/sru1038-6r2y/bourns, Datasheet Link=https://www.mouser.com/datasheet/2/54/sru1038-1391493.pdf, Geometry.Height=6.1mm, Manufacturer Part Number=SRU1038-6R2Y, Mouser Price/Stock=https://www.mouser.co.uk/ProductDetail/Bourns/SRU1038-6R2Y?qs=q9ZR8LvBB%2FuBaClm0822pQ%3D%3D
L2: library part IHLP2525CZER8R2M01_1, "8.2 µH Shielded Molded Inductor 4 A 68mOhm Max Nonstandard", LCSC Manufacturer Part Number=IHLP2525CZER8R2M01, LCSC Part Number=C506576, Manufacturer Part Number=IHLP2525CZER8R2M01, Order Code="Digi: 541-1012-2-ND"
MTG1 MTG2 MTG3 MTG4: library part MTG3MM
Q1 Q2: "Transistor", Manufacturer_Name="Diodes Incorporated", Mouser Part Number=621-DMN6140L-7, Arrow Part Number=DMN6140L-7, Arrow Price/Stock=https://www.arrow.com/en/products/dmn6140l-7/diodes-incorporated?utm_currency=USD&region=asia, Datasheet Link=https://www.diodes.com//assets/Datasheets/DMN6140L.pdf, Height=1.1mm, Manufacturer_Part_Number=DMN6140L-7, Mouser Price/Stock=https://www.mouser.co.uk/ProductDetail/Diodes-Incorporated/DMN6140L-7?qs=M%2FOdCRO8QQ0gki98nN7lXQ%3D%3D
Q3 Q4: "60-V, N channel NexFETâ„¢ power MOSFET, single SON 5 mm x 6 mm, 2.2 mOhm", Package="VSON-CLIP-8 Texas Instruments", Check_prices=https://www.snapeda.com/parts/CSD18540Q5B/Texas+Instruments/view-part/?ref=eda, MF="Texas Instruments", MP=CSD18540Q5B, SnapEDA_Link=https://www.snapeda.com/parts/CSD18540Q5B/Texas+Instruments/view-part/?ref=snap
Q5 Q6 Q7 Q8 Q9 Q10 Q11 Q12: "Transistor", Manufacturer_Name=Infineon, Mouser Part Number=N/A, Datasheet Link=https://www.infineon.com/dgdl/Infineon-BSC072N08NS5-DS-v02_00-EN.pdf?fileId=5546d4624ad04ef9014ae3d8e8192c7c, Manufacturer_Part_Number=BSC072N08NS5, Mouser Price/Stock=https://www.mouser.co.uk/ProductDetail/Infineon-Technologies/BSC072N08NS5?qs=eERmAtE5kX0PueJFVqKhsA%3D%3D
R1 R2 R3 R4 R5 R16 R17 R18 R19 R20 R21 R22 R23: library part 0805W8F2003T5E, "-55℃~+155℃ 125mW 150V 200kΩ Thick Film Resistor ±1% ±100ppm/℃ 0805 Chip Resistor - Surface Mount ROHS"
R6 R7 R8 R9: library part RMCF0402FT10K0, "RES 10K OHM 1% 1/16W 0402", Device Package="0402 (1005 Metric)", manufacturer="Stackpole Electronics Inc", Operating Temperature="-55°C ~ 155°C", Power (Watts)="0.063W, 1/16W", Ratings=AEC-Q200, Supplier Device Package=0402, Supplier Part Number 1=RMCF0402FT10K0CT-ND, Temperature Coefficient=±100ppm/°C, Tolerance=±1%, componentlink1description=Datasheet, componentlink1url=https://www.seielect.com/catalog/sei-rmcf_rmcp.pdf, componentlink2description="DigiKey Link", componentlink2url=https://www.digikey.com/en/products/detail/stackpole-electronics-inc/RMCF0402FT10K0/1761433, Composition="Thick Film", Features="Automotive AEC-Q200", Height - Seated (Max)="0.016\" (0.40mm)", lastupdated="9.02.2024 20:29:20", Lifecycle Status=Active, Minimum Order=1, Number of Terminations=2, Package / Case="0402 (1005 Metric)", packaging=CutTape, Part Number=RMCF0402FT10K0, Part Status=Active, partid=20541, price=0.01, Resistance="10 kOhms", series=RMCF, Size / Dimension="0.039\" L x 0.020\" W (1.00mm x 0.50mm)", Supplier 1=DigiKey
R10: library part RMCF0402ZT0R00, "RES 0 OHM JUMPER 1/16W 0402", Device Package="0402 (1005 Metric)", manufacturer="Stackpole Electronics Inc", Operating Temperature="-55°C ~ 155°C", Power (Watts)="0.063W, 1/16W", Ratings=AEC-Q200, Supplier Device Package=0402, Supplier Part Number 1=RMCF0402ZT0R00CT-ND, Tolerance=Jumper, componentlink1description=Datasheet, componentlink1url=https://www.seielect.com/catalog/sei-rmcf_rmcp.pdf, componentlink2description="DigiKey Link", componentlink2url=https://www.digikey.com/en/products/detail/stackpole-electronics-inc/RMCF0402ZT0R00/1756905, Composition="Thick Film", Features="Automotive AEC-Q200", Height - Seated (Max)="0.016\" (0.40mm)", lastupdated="9.02.2024 20:29:34", Lifecycle Status=Active, Minimum Order=1, Number of Terminations=2, Package / Case="0402 (1005 Metric)", packaging=CutTape, Part Number=RMCF0402ZT0R00, Part Status=Active, partid=17627, price=0.01, Resistance="0 Ohms", series=RMCF, Size / Dimension="0.039\" L x 0.020\" W (1.00mm x 0.50mm)", Supplier 1=DigiKey
R11 R12: library part RMCF0402FT1K00, "RES 1K OHM 1% 1/16W 0402", Device Package="0402 (1005 Metric)", manufacturer="Stackpole Electronics Inc", Operating Temperature="-55°C ~ 155°C", Power (Watts)="0.063W, 1/16W", Ratings=AEC-Q200, Supplier Device Package=0402, Supplier Part Number 1=RMCF0402FT1K00CT-ND, Temperature Coefficient=±100ppm/°C, Tolerance=±1%, componentlink1description=Datasheet, componentlink1url=https://www.seielect.com/catalog/sei-rmcf_rmcp.pdf, componentlink2description="DigiKey Link", componentlink2url=https://www.digikey.com/en/products/detail/stackpole-electronics-inc/RMCF0402FT1K00/1761754, Composition="Thick Film", Features="Automotive AEC-Q200", Height - Seated (Max)="0.016\" (0.40mm)", lastupdated="9.02.2024 20:29:20", Lifecycle Status=Active, Minimum Order=1, Number of Terminations=2, Package / Case="0402 (1005 Metric)", packaging=CutTape, Part Number=RMCF0402FT1K00, Part Status=Active, partid=20544, price=0.01, Resistance="1 kOhms", series=RMCF, Size / Dimension="0.039\" L x 0.020\" W (1.00mm x 0.50mm)", Supplier 1=DigiKey
R13 R14: library part RMCF0402FT56R0, "56 Ohms ±1% 0.063W, 1/16W Chip Resistor 0402 (1005 Metric) Automotive AEC-Q200 Thick Film", Manİfacturer="Stackpole Electronics Inc", Supplier="Digi; RMCF0402FT56R0DKR-ND"
R15: library part RMCF0402FT330R, "330 Ohms ±1% 0.063W, 1/16W Chip Resistor 0402 (1005 Metric) Automotive AEC-Q200 Thick Film", Manifacturer="Stackpole Electronics Inc", Supplier="Digi; RMCF0402FT330RDKR-ND"
R24 R29 R60 R61 R62 R63 R64 R66: library part TNPW060310K0FHTA, "10 kOhms ±1% 0.1W, 1/10W Chip Resistor 0603 (1608 Metric) Automotive AEC-Q200 Thin Film", manufacturer="Vishay Dale", Supplier="Digi; 541-3906-6-ND"
R25 R30: library part RT0402FRE074K7L, "RES SMD 4.7K OHM 1% 1/16W 0402", Case Code (Imperial)=0402, manufacturer="Yageo Group", Max Operating Temperature=155°C, Max Power Dissipation=63mW, Min Operating Temperature=-55°C, Power Rating=62.5mW, Temperature Coefficient=50ppm/°C, Tolerance=1%, Voltage Rating=50V, Case/Package=0402, Category="Chip SMD Resistors", China RoHS=Non-Compliant, Composition="Thin Film", Contact Plating="Lead, Tin", Country of Origin="Mainland China", Export Control Classification Number (ECCN) Code=EAR99, Features="Moisture Resistant", Harmonized Tariff Schedule (HTS) Code=8533.21.00.30, Height=300µm, Introduction Date=2008-06-09, Lead Free="Lead Free", Length=1mm, Lifecycle Status=Production, Manufacturer Part Number=RT0402FRE074K7L, Mounting Technology="Surface Mount", Number of Terminals=2, Number of Terminations=2, Radiation Hardening=No, REACH SVHC=Yes, RoHS=Compliant, Schedule B="8533210045, 8533210045|8533210045, 8533210045|8533210045|8533210045, 8533210045|8533210045|8533210045|8533210045", Termination=SMD/SMT, Voltage Rating (DC)=50V, Width=500µm, Working Voltage=50V
R26 R31: library part CPF0603B1K0E, "RES SMD 1K OHM 0.1% 1/16W 0603", Case Code (Metric)=1608, Case/Package=0603, manufacturer="TE Connectivity", Manufacturer Lifecycle Status=ACTIVE, Max Operating Temperature=155°C, Max Power Dissipation=63mW, Min Operating Temperature=-55°C, Number of Resistors=1, Operating Supply Voltage=50V, Temperature Coefficient=25ppm/°C, Tolerance=0.1%, Category="Chip SMD Resistors", China RoHS=Compliant, Composition="Thin Film", Depth=800µm, ELV=Compliant, Export Control Classification Number (ECCN) Code=EAR99, Harmonized Tariff Schedule (HTS) Code=8533.21.00.30, Height=450µm, Introduction Date=2009-09-20, Length=1.55mm, Lifecycle Status=Production, Manufacturer Part Number=CPF0603B1K0E, Mounting Technology="Surface Mount", Number of Terminals=2, Number of Terminations=2, packaging="Tape and Reel", Power Rating=63mW, Radiation Hardening=No, REACH SVHC=Yes, RoHS=Compliant, Schedule B=8533210045|8533210045|8533210045|8533210045|8533210045, Termination=Solder, Voltage Rating=50V, Voltage Rating (DC)=50V, Weight=2.012816mg, Width=800µm, Working Voltage=50V
R27 R32: library part RC0603JR07100RL, "Resistor", Manufacturer_Name="Yageo Group", Arrow Part Number=RC0603JR07100RL, Arrow Price/Stock=https://www.arrow.com/en/products/rc0603jr-07100rl/yageo, Datasheet Link=http://www.yageo.com/documents/recent/PYu-RC0603_51_RoHS_L_v5.pdf, Height=0.55mm, Manufacturer_Part_Number=RC0603JR07100RL
R28 R33: library part RES0603_100K_%1, "100 kOhms ±1% 0.1W, 1/10W Chip Resistor 0603 (1608 Metric) Moisture Resistant Thick Film", LCSC Manufacturer Part Number=RC0603FR-07100KL, LCSC Part Number=C123419, Manufacturer Part Number=RC0603FR-07100KL, Order Code="DIGI : 311-100KHRTR-ND"
R34 R35 R43 R44: library part RMCF0603FT110K, "RES 110K OHM 1% 1/10W 0603", Device Package="0603 (1608 Metric)", manufacturer="Stackpole Electronics Inc", Operating Temperature="-55°C ~ 155°C", Power (Watts)="0.1W, 1/10W", Ratings=AEC-Q200, Supplier Device Package=0603, Supplier Part Number 1=RMCF0603FT110KCT-ND, Temperature Coefficient=±100ppm/°C, Tolerance=±1%, componentlink1description=Datasheet, componentlink1url=https://www.seielect.com/catalog/sei-packaging.pdf, componentlink2description="DigiKey Link", componentlink2url=https://www.digikey.com/en/products/detail/stackpole-electronics-inc/RMCF0603FT110K/1761310, Composition="Thick Film", Features="Automotive AEC-Q200", Height - Seated (Max)="0.022\" (0.55mm)", lastupdated="9.02.2024 20:43:13", Lifecycle Status=Active, Minimum Order=1, Number of Terminations=2, Package / Case="0603 (1608 Metric)", packaging=CutTape, Part Number=RMCF0603FT110K, Part Status=Active, partid=10728, price=0.01, Resistance="110 kOhms", series=RMCF, Size / Dimension="0.061\" L x 0.031\" W (1.55mm x 0.80mm)", Supplier 1=DigiKey
R36: library part RMCF0603FG17K8, "RES 17.8K OHM 1% 1/10W 0603", Device Package="0603 (1608 Metric)", manufacturer="Stackpole Electronics Inc", Operating Temperature="-55°C ~ 155°C", Power (Watts)="0.1W, 1/10W", Ratings=AEC-Q200, Supplier Device Package=0603, Supplier Part Number 1=RMCF0603FG17K8CT-ND, Temperature Coefficient=±100ppm/°C, Tolerance=±1%, componentlink1description=Datasheet, componentlink1url=https://www.seielect.com/catalog/sei-rmcf_rmcp.pdf, componentlink2description="DigiKey Link", componentlink2url=https://www.digikey.com/en/products/detail/stackpole-electronics-inc/RMCF0603FG17K8/1713668, Composition="Thick Film", Features="Automotive AEC-Q200", Height - Seated (Max)="0.022\" (0.55mm)", lastupdated="9.02.2024 20:42:38", Lifecycle Status=Active, Minimum Order=1, Number of Terminations=2, Package / Case="0603 (1608 Metric)", packaging=CutTape, Part Number=RMCF0603FG17K8, Part Status=Active, partid=19862, price=0.01, Resistance="17.8 kOhms", series=RMCF, Size / Dimension="0.061\" L x 0.031\" W (1.55mm x 0.80mm)", Supplier 1=DigiKey
R37: library part RMCF0603FT3K57, "RES 3.57K OHM 1% 1/10W 0603", Device Package="0603 (1608 Metric)", manufacturer="Stackpole Electronics Inc", Operating Temperature="-55°C ~ 155°C", Power (Watts)="0.1W, 1/10W", Ratings=AEC-Q200, Supplier Device Package=0603, Supplier Part Number 1=RMCF0603FT3K57CT-ND, Temperature Coefficient=±100ppm/°C, Tolerance=±1%, componentlink1description=Datasheet, componentlink1url=https://www.seielect.com/catalog/sei-rmcf_rmcp.pdf, componentlink2description="DigiKey Link", componentlink2url=https://www.digikey.com/en/products/detail/stackpole-electronics-inc/RMCF0603FT3K57/1761029, Composition="Thick Film", Features="Automotive AEC-Q200", Height - Seated (Max)="0.022\" (0.55mm)", lastupdated="9.02.2024 20:42:52", Lifecycle Status=Active, Minimum Order=1, Number of Terminations=2, Package / Case="0603 (1608 Metric)", packaging=CutTape, Part Number=RMCF0603FT3K57, Part Status=Active, partid=16325, price=0.01, Resistance="3.57 kOhms", series=RMCF, Size / Dimension="0.061\" L x 0.031\" W (1.55mm x 0.80mm)", Supplier 1=DigiKey
R38: library part RMCF0603FT7K15, "RES 7.15K OHM 1% 1/10W 0603", Device Package="0603 (1608 Metric)", manufacturer="Stackpole Electronics Inc", Operating Temperature="-55°C ~ 155°C", Power (Watts)="0.1W, 1/10W", Ratings=AEC-Q200, Supplier Device Package=0603, Supplier Part Number 1=RMCF0603FT7K15CT-ND, Temperature Coefficient=±100ppm/°C, Tolerance=±1%, componentlink1description=Datasheet, componentlink1url=https://www.seielect.com/catalog/sei-packaging.pdf, componentlink2description="DigiKey Link", componentlink2url=https://www.digikey.com/en/products/detail/stackpole-electronics-inc/RMCF0603FT7K15/1760937, Composition="Thick Film", Features="Automotive AEC-Q200", Height - Seated (Max)="0.022\" (0.55mm)", lastupdated="9.02.2024 20:42:27", Lifecycle Status=Active, Minimum Order=1, Number of Terminations=2, Package / Case="0603 (1608 Metric)", packaging=CutTape, Part Number=RMCF0603FT7K15, Part Status=Active, partid=22551, price=0.01, Resistance="7.15 kOhms", series=RMCF, Size / Dimension="0.061\" L x 0.031\" W (1.55mm x 0.80mm)", Supplier 1=DigiKey
R39 R48: library part RMCF0603FT10K0, "RES 10K OHM 1% 1/10W 0603", Device Package="0603 (1608 Metric)", manufacturer="Stackpole Electronics Inc", Operating Temperature="-55°C ~ 155°C", Power (Watts)="0.1W, 1/10W", Ratings=AEC-Q200, Supplier Device Package=0603, Supplier Part Number 1=RMCF0603FT10K0CT-ND, Temperature Coefficient=±100ppm/°C, Tolerance=±1%, componentlink1description=Datasheet, componentlink1url=https://www.seielect.com/catalog/sei-rmcf_rmcp.pdf, componentlink2description="DigiKey Link", componentlink2url=https://www.digikey.com/en/products/detail/stackpole-electronics-inc/RMCF0603FT10K0/1761235, Composition="Thick Film", Features="Automotive AEC-Q200", Height - Seated (Max)="0.022\" (0.55mm)", lastupdated="9.02.2024 20:42:00", Lifecycle Status=Active, Minimum Order=1, Number of Terminations=2, Package / Case="0603 (1608 Metric)", packaging=CutTape, Part Number=RMCF0603FT10K0, Part Status=Active, partid=25663, price=0.01, Resistance="10 kOhms", series=RMCF, Size / Dimension="0.061\" L x 0.031\" W (1.55mm x 0.80mm)", Supplier 1=DigiKey
R40 R41 R42 R47: library part RMCF0603FG1K00, "RES 1K OHM 1% 1/10W 0603", Device Package="0603 (1608 Metric)", manufacturer="Stackpole Electronics Inc", Operating Temperature="-55°C ~ 155°C", Power (Watts)="0.1W, 1/10W", Ratings=AEC-Q200, Supplier Device Package=0603, Supplier Part Number 1=RMCF0603FG1K00CT-ND, Temperature Coefficient=±100ppm/°C, Tolerance=±1%, componentlink1description=Datasheet, componentlink1url=https://www.seielect.com/catalog/sei-packaging.pdf, componentlink2description="DigiKey Link", componentlink2url=https://www.digikey.com/en/products/detail/stackpole-electronics-inc/RMCF0603FG1K00/1713699, Composition="Thick Film", Features="Automotive AEC-Q200", Height - Seated (Max)="0.022\" (0.55mm)", lastupdated="9.02.2024 20:42:15", Lifecycle Status=Active, Minimum Order=1, Number of Terminations=2, Package / Case="0603 (1608 Metric)", packaging=CutTape, Part Number=RMCF0603FG1K00, Part Status=Active, partid=24034, price=0.01, Resistance="1 kOhms", series=RMCF, Size / Dimension="0.061\" L x 0.031\" W (1.55mm x 0.80mm)", Supplier 1=DigiKey
R45: library part RMCF0603FT24K9, "RES 24.9K OHM 1% 1/10W 0603", Device Package="0603 (1608 Metric)", manufacturer="Stackpole Electronics Inc", Operating Temperature="-55°C ~ 155°C", Power (Watts)="0.1W, 1/10W", Ratings=AEC-Q200, Supplier Device Package=0603, Supplier Part Number 1=RMCF0603FT24K9CT-ND, Temperature Coefficient=±100ppm/°C, Tolerance=±1%, componentlink1description=Datasheet, componentlink1url=https://www.seielect.com/catalog/sei-rmcf_rmcp.pdf, componentlink2description="DigiKey Link", componentlink2url=https://www.digikey.com/en/products/detail/stackpole-electronics-inc/RMCF0603FT24K9/1760847, Composition="Thick Film", Features="Automotive AEC-Q200", Height - Seated (Max)="0.022\" (0.55mm)", lastupdated="9.02.2024 20:43:13", Lifecycle Status=Active, Minimum Order=1, Number of Terminations=2, Package / Case="0603 (1608 Metric)", packaging=CutTape, Part Number=RMCF0603FT24K9, Part Status=Active, partid=10847, price=0.01, Resistance="24.9 kOhms", series=RMCF, Size / Dimension="0.061\" L x 0.031\" W (1.55mm x 0.80mm)", Supplier 1=DigiKey
R46: library part RMCF0603FT2K20, "RES 2.2K OHM 1% 1/10W 0603", Device Package="0603 (1608 Metric)", manufacturer="Stackpole Electronics Inc", Operating Temperature="-55°C ~ 155°C", Power (Watts)="0.1W, 1/10W", Ratings=AEC-Q200, Supplier Device Package=0603, Supplier Part Number 1=RMCF0603FT2K20CT-ND, Temperature Coefficient=±100ppm/°C, Tolerance=±1%, componentlink1description=Datasheet, componentlink1url=https://www.seielect.com/catalog/sei-packaging.pdf, componentlink2description="DigiKey Link", componentlink2url=https://www.digikey.com/en/products/detail/stackpole-electronics-inc/RMCF0603FT2K20/1760987, Composition="Thick Film", Features="Automotive AEC-Q200", Height - Seated (Max)="0.022\" (0.55mm)", lastupdated="9.02.2024 20:43:32", Lifecycle Status=Active, Minimum Order=1, Number of Terminations=2, Package / Case="0603 (1608 Metric)", packaging=CutTape, Part Number=RMCF0603FT2K20, Part Status=Active, partid=6089, price=0.01, Resistance="2.2 kOhms", series=RMCF, Size / Dimension="0.061\" L x 0.031\" W (1.55mm x 0.80mm)", Supplier 1=DigiKey
R49 R50 R53 R54 R55 R56 R57 R58: library part RNCF0603AKT10R0, "Resistor", Manufacturer_Name="Stackpole Electronics", Mouser Part Number=708-RNCF0603AKT10R0, Arrow Part Number=RNCF0603AKT10R0, Arrow Price/Stock=https://www.arrow.com/en/products/rncf0603akt10r0/stackpole-electronics?region=nac, Datasheet Link=https://cs.seielect.com/catalog/SEI-RNCF.pdf, Height=0.55mm, Manufacturer_Part_Number=RNCF0603AKT10R0, Mouser Price/Stock=https://www.mouser.co.uk/ProductDetail/SEI-Stackpole/RNCF0603AKT10R0?qs=IPgv5n7u5QaEV3NAu4qPaA%3D%3D
R51: library part Res1_7, "RES 2.2K OHM 1% 1/16W 0402", manufacturer=Yageo, Manufacturer Part Number=RC0402FR-072K2L, Supplier Part Number=311-2.20KLRCT-ND
R52: library part Res1, "RES 0 OHM JUMPER 1/16W 0402", manufacturer=Yageo, Manufacturer Part Number=RC0402FR-070RL, Supplier Part Number=311-0.0LRCT-ND
R59: library part RMCF0603FT24K0, "24 kOhms ±1% 0.1W, 1/10W Chip Resistor 0603 (1608 Metric) Automotive AEC-Q200 Thick Film", manufacturer="Stackpole Electronics Inc", Supplier="Digi; RMCF0603FT24K0DKR-ND"
R65: library part 0603WAF1003T5E, "-55℃~+155℃ 100kΩ 100mW 75V Thick Film Resistor ±1% ±100ppm/℃ 0603 Chip Resistor - Surface Mount ROHS", manufacturer="UNI-ROYAL(Uniroyal Elec)", Supplier_JLCPCB=C25803, Supplier_MOUSER=303-0603WAF1003T5E
T1 T2: library part TP_15, DESIG="testing PAD", FAB=NA, PCB Footprint=test0_8-smd, REF=NA, VAL="NOT POPULATED"
U1: "Buck Regulator Positive Output Step-Down DC-DC Controller IC 20-VQFN (3.5x4.5)", manufacturer="Texas Instruments", Supplier="Digi; 296-LM5146RGYRDKR-ND"
U2 U3: "N-Channel 60 V 60A (Tc) 66W (Tc) Surface Mount 8-VSONP (3x3.3)"
U4: "ARM Cortex-M3 32-bit MCU, 64 KB Flash, 20 KB Internal RAM, 37 I/Os, 48-pin LQFP, -40 to 85 degC, Tray", I/Os (High Current)=37, LCSC Part Number=C8734, Operating Frequency(F) (Processor speed) (MHz)=72, Supply Voltage(Vcc) min (V)=2, A/D Converter="2x12-bit (10 Channel)", componentlink1description="Manufacturer URL", componentlink1url=http://www.st.com/web/en/home.html, componentlink2description=Datasheet, componentlink2url=http://www.st.com/st-web-ui/static/active/en/resource/technical/document/datasheet/CD00161566.pdf, ComponentLink3Description="Package Specification", ComponentLink3URL=http://www.st.com/st-web-ui/static/active/en/resource/technical/document/datasheet/DM00058181.pdf, Core="ARM Cortex-M3", DatasheetVersion="Rev. 16", FLASH Size (Prog) (kB)=64, Internal RAM Size (kB)=20, LCSC Manufacturer Part Number=STM32F103C8T6, Manufacturer Part Number=STM32F103C8T6, Mounting Technology="Surface Mount", PackageDescription="48-Pin Low Profile Quad Flat Package, 7 x 7 mm Body, 0.5 mm Pitch", PackageReference=LQFP48, PackageVersion="Rev. 6, 06/2013", Packing=Tray
U5: "1Mbps Transceiver 3V~3.6V SOIC-8 CAN ICs ROHS", LCSC Part Number=C30530, Manufacturer Part Number=SN65HVD232DR
U6: "SSR RELAY SPST-NO 400MA 0-60V", manufacturer="IXYS Integrated Circuits Division", Supplier Part Number=CLA314CT-ND, Manufacturer Part Number=CPC1014NTR